# EAGLE board JM-AppChallenge (EAGLE 9.7.0)

Size 107.34 x 90.45 mm. Coordinates in mm from the lower left corner, seen from the top.
Outline: 0,0 107.34,0 107.34,90.45 0,90.45 0,0
Copper layers (1*16): Top 0.035mm / dielectric 1.5mm / Bottom 0.035mm
Design rules "default": minimum track width 6mil, minimum drill 0.35mm, track to track 6mil, track to pad 6mil, pad to pad 6mil, via to via 6mil, smd to smd 6mil, copper to edge 40mil, drill to drill 6mil, minimum pad ring 10mil, minimum via ring 8mil, stop-mask expansion 4mil, vias tented up to drill 0mil, thermal gap 10mil

## Footprints (pad centres in the part's own frame; a part is rotated, then mirrored left to right if it is on the bottom)
LEDRD254W60D565H860B = drill 0.981 pad 1.581: 1 -1.27,0; 2 1.27,0
RESAD1016W63L850D250B = drill 0.83 pad 1.43: 1 -5.08,0; 2 5.08,0
SWITCH-MOMENTARY-PTH-6.5MM = drill 1.016 pad 1.88: 1 -3.251,2.261; 2 3.251,2.261; 3 -3.251,-2.261; 4 3.251,-2.261
DIL16 = drill 0.813 long: 1 -8.89,-3.81; 2 -6.35,-3.81; 3 -3.81,-3.81; 4 -1.27,-3.81; 5 1.27,-3.81; 6 3.81,-3.81; 7 6.35,-3.81; 8 8.89,-3.81; 9 8.89,3.81; 10 6.35,3.81; 11 3.81,3.81; 12 1.27,3.81; 13 -1.27,3.81; 14 -3.81,3.81; 15 -6.35,3.81; 16 -8.89,3.81
ARDUINO-UNO-R3-SHIELD = drill 1.016 pad 1.88: 3.3V 24.13,-2.54; 5V 24.13,0; A0 24.13,12.7; A1 24.13,15.24; A2 24.13,17.78; A3 24.13,20.32; A4 24.13,22.86; A5 24.13,25.4; AREF -24.13,-13.97; D2 -24.13,20.32; D3 -24.13,17.78; D4 -24.13,15.24; D5 -24.13,12.7; D6 -24.13,10.16; D7 -24.13,7.62; D8 -24.13,3.81; D9 -24.13,1.27; D10 -24.13,-1.27; D11 -24.13,-3.81; D12 -24.13,-6.35; D13 -24.13,-8.89; GND@0 24.13,2.54; GND@1 24.13,5.08; GND@2 -24.13,-11.43; IOREF 24.13,-7.62; NC 24.13,-10.16; RES 24.13,-5.08; RX -24.13,25.4; SCL -24.13,-19.05; SDA -24.13,-16.51; TX -24.13,22.86; VIN 24.13,7.62

## Placement (x,y rotation side)
DLED1  RED  [LEDRD254W60D565H860B]  54.8,78.14 180 top
DLED2  RED  [LEDRD254W60D565H860B]  68.95,77.81 180 top
DLED3  RED  [LEDRD254W60D565H860B]  18.81,77.21 180 top
DLED4  RED  [LEDRD254W60D565H860B]  38.31,77.39 180 top
R4  4.7k  [RESAD1016W63L850D250B]  27.18,9.51 90 top
R5  4.7k  [RESAD1016W63L850D250B]  32.26,8.97 90 top
RPB1  10k  [RESAD1016W63L850D250B]  100.83,34.36 90 top
RPB2  10k  [RESAD1016W63L850D250B]  101.01,19.44 90 top
RPB3  10k  [RESAD1016W63L850D250B]  100.65,48.59 90 top
RPB4  10k  [RESAD1016W63L850D250B]  99.92,64.81 90 top
RREST1  220  [RESAD1016W63L850D250B]  63.54,81.48 90 top
RREST2  220  [RESAD1016W63L850D250B]  77.46,81.2 90 top
RREST3  220  [RESAD1016W63L850D250B]  27.01,80.12 90 top
RREST4  220  [RESAD1016W63L850D250B]  46.15,80.12 90 top
S1  SWITCH_MOMENTARY  [SWITCH-MOMENTARY-PTH-6.5MM]  91.9,48.59 90 top
S2  SWITCH_MOMENTARY  [SWITCH-MOMENTARY-PTH-6.5MM]  92.26,19.43 90 top
S3  SWITCH_MOMENTARY  [SWITCH-MOMENTARY-PTH-6.5MM]  91.71,64.08 90 top
SPBUTTON1  SWITCH_MOMENTARY  [SWITCH-MOMENTARY-PTH-6.5MM]  91.9,34.19 90 top
UPCF  PCF8574DIP16  [DIL16]  53.76,49.63 0 top
UR3  ARDUINO-UNO-R3-SHIELD  [ARDUINO-UNO-R3-SHIELD]  47.88,47.67 270 top

## Library data of the parts
DLED1-DLED4 = Tinkercad; CATEGORY: Opto-Electronic; SUB-CATEGORY: LED; VALUE: LED_RED
R4 R5 RPB1-RPB4 RREST1-RREST4 S1-S3 SPBUTTON1 UPCF UR3 = Tinkercad

## Nets
DLED1_A: DLED1.1 RREST1.2
DLED2_A: DLED2.1 RREST2.2
DLED3_A: DLED3.1 RREST3.2
DLED4_A: DLED4.1 RREST4.2
UPCF_P0: DLED1.2 UPCF.4
UPCF_P1: DLED2.2 UPCF.5
UPCF_P2: DLED3.2 UPCF.6
UPCF_P3: DLED4.2 UPCF.7
UPCF_P4: RPB1.2 SPBUTTON1.1 UPCF.9
UPCF_P5: RPB2.2 S2.1 UPCF.10
UPCF_P6: RPB3.2 S1.1 UPCF.11
UPCF_P7: RPB4.2 S3.1 UPCF.12
UPCF_VDD: R5.1 UPCF.16
UR3_5V: R4.2 R5.2 RPB1.1 RPB2.1 RPB3.1 RPB4.1 RREST1.1 RREST2.1 RREST3.1 RREST4.1 UR3.5V
UR3_D8: R4.1 UPCF.15 UR3.D8
UR3_D9: UPCF.14 UR3.D9
UR3_GND: S1.3 S2.3 S3.3 SPBUTTON1.3 UPCF.1 UPCF.2 UPCF.3 UPCF.8 UR3.GND@0 UR3.GND@1 UR3.GND@2

## Tracks (layer width: path | path; a pad name or v marks a point on that pad's centre or on a via)
DLED1_A  (1 unrouted)
DLED2_A  (1 unrouted)
DLED3_A  (1 unrouted)
DLED4_A  (1 unrouted)
UPCF_P0  (1 unrouted)
UPCF_P1  (1 unrouted)
UPCF_P2  (1 unrouted)
UPCF_P3  (1 unrouted)
UPCF_P4  (2 unrouted)
UPCF_P5  (2 unrouted)
UPCF_P6  (2 unrouted)
UPCF_P7  (2 unrouted)
UPCF_VDD  (1 unrouted)
UR3_5V  (10 unrouted)
UR3_D8  (2 unrouted)
UR3_D9  (1 unrouted)
UR3_GND  (10 unrouted)